# Altium PCB PCB1.PcbDoc
Units mil, origin at the board's own origin, x right, y up, seen from the top; angles counter-clockwise.
Board outline 2325 x 1332 mil, 2 copper layers (Top Layer, Bottom Layer), stack 61.756 mil thick; 66 components, 50 nets, 247 pads, 70 vias.
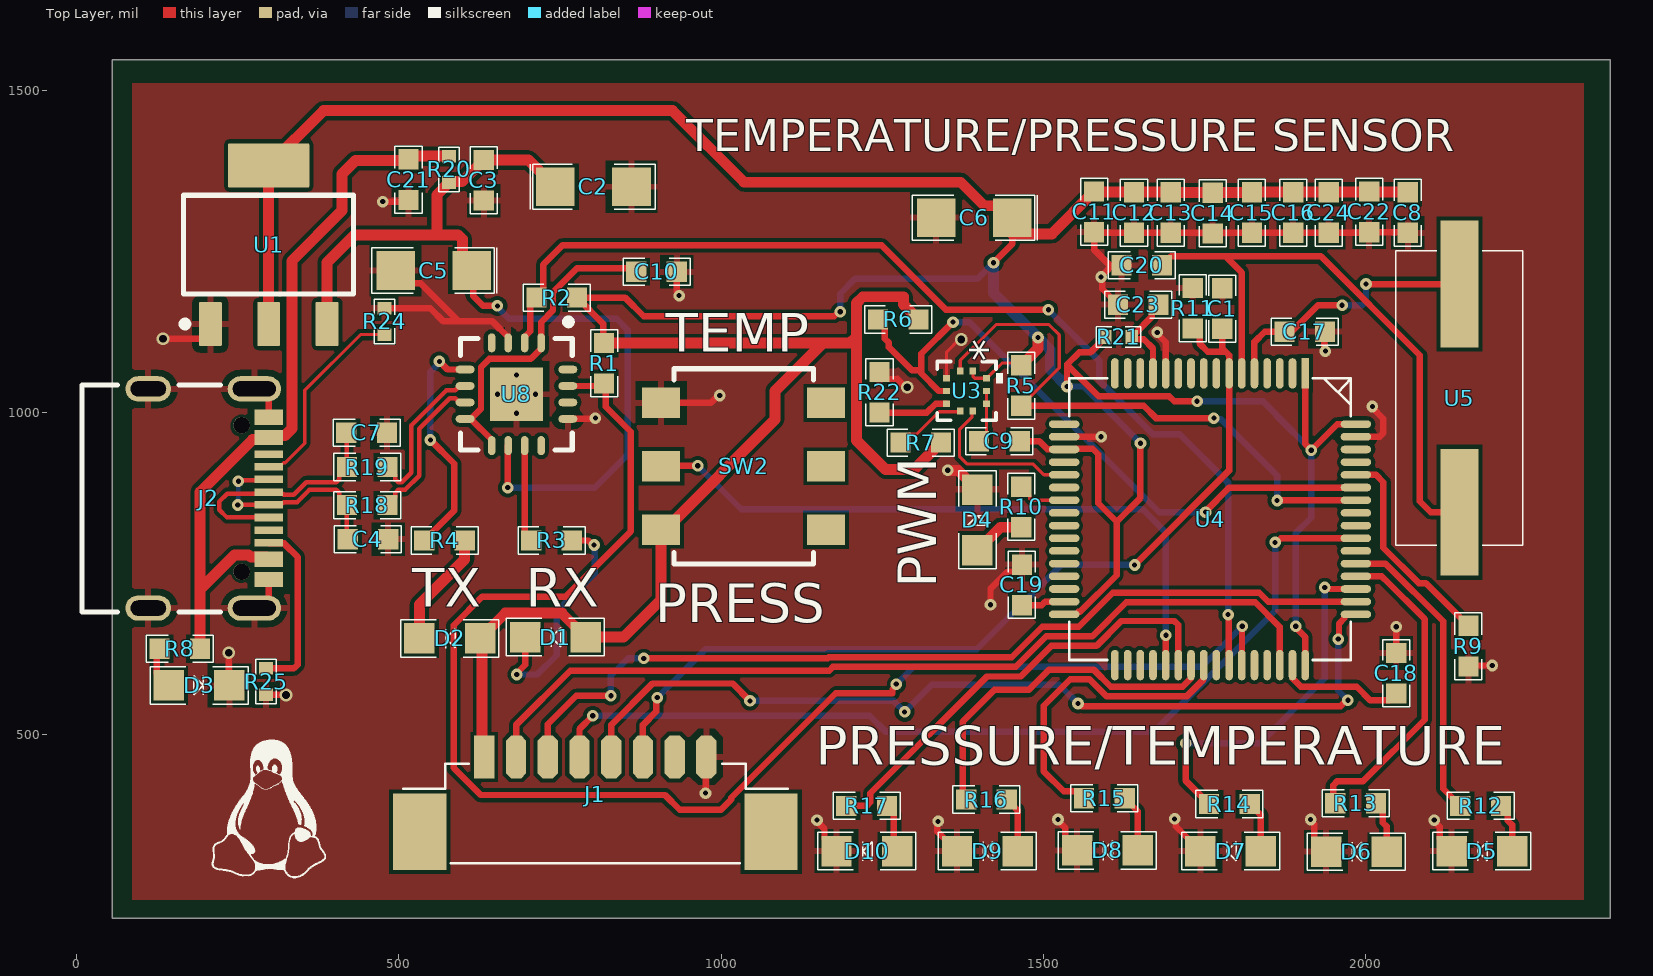
[diagram p0: Top Layer view]
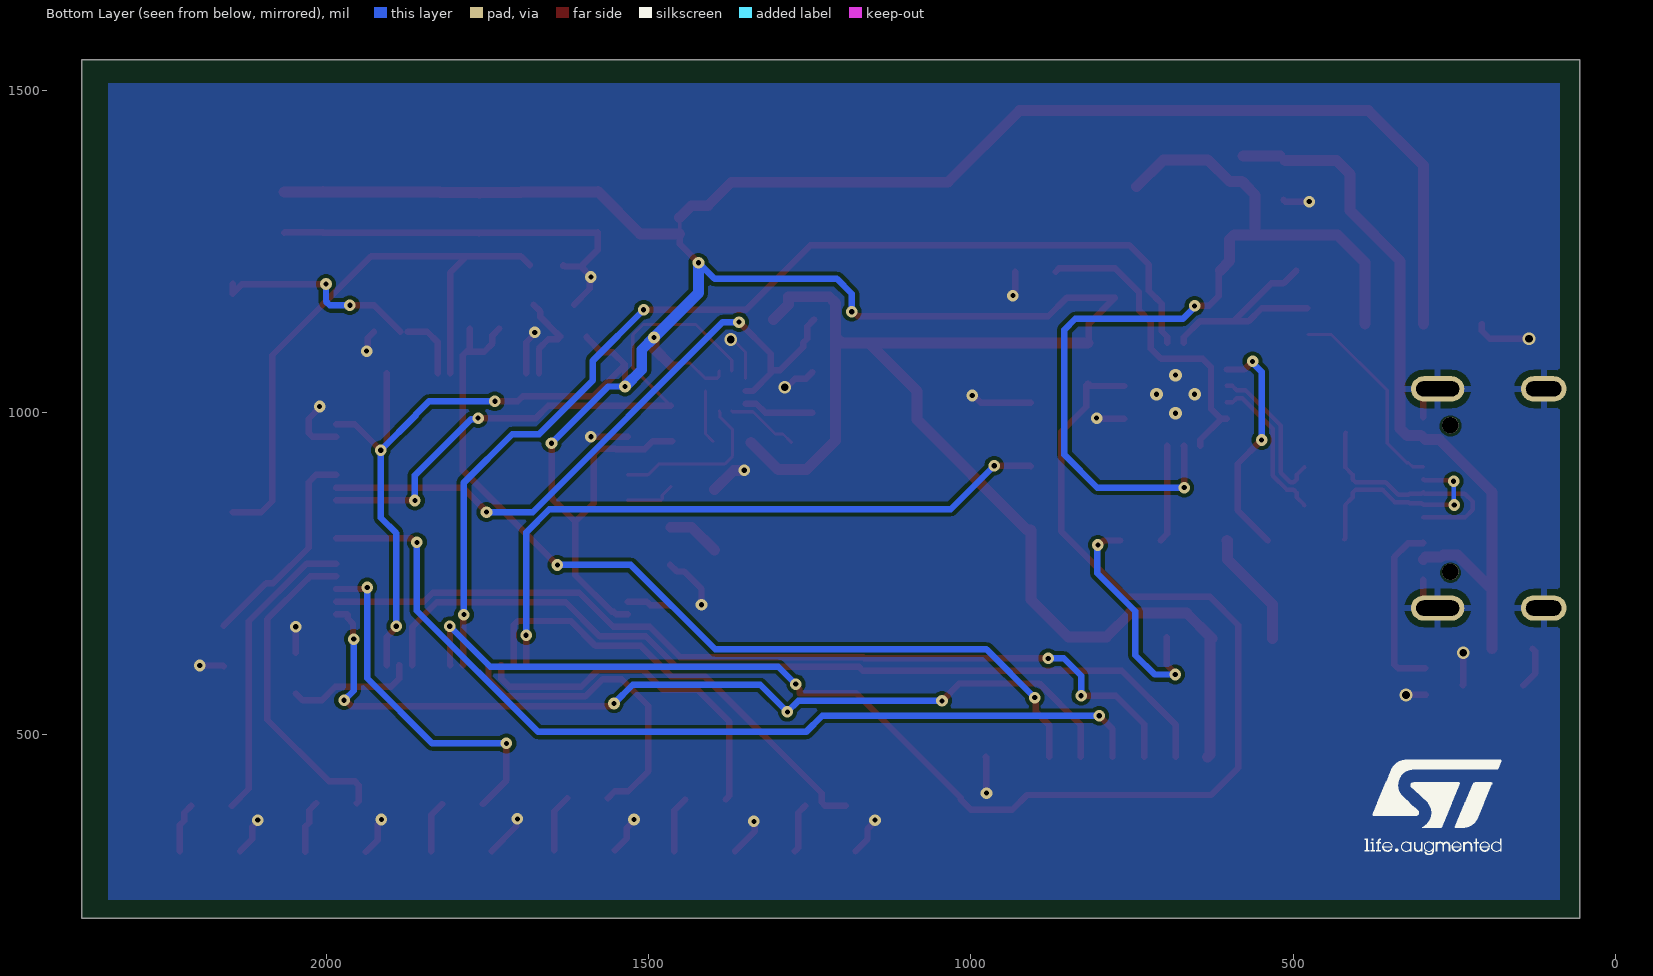
[diagram p1: Bottom Layer view, seen from below]

## Layer stack, top to bottom
Top Solder: solder mask 1, SM-001, Dk 4
Top Layer: signal copper 1.378
Dielectric 1: core 59, Core-043, Dk 4.3
Bottom Layer: signal copper 1.378
Bottom Solder: solder mask 1, SM-001, Dk 4

## Board outline
55,215 55,1547 2380,1547 2380,215

## Design rules (kind name [scope] priority, off if disabled: settings)
Clearance [All vs InPoly] p1: gap=6 ignorepadtopadclearanceinfootprint=FALSE except(0: Arc-Hole Track-Hole SMDPad-Hole THPad-Hole Via-Hole Fill-Hole Poly-Hole Region-Hole Text-Hole)
Clearance Clearance_1 [All] p2: gap=5 ignorepadtopadclearanceinfootprint=FALSE except(0: Arc-Hole Track-Hole SMDPad-Hole THPad-Hole Via-Hole Fill-Hole Poly-Hole Region-Hole Text-Hole)
DiffPairsRouting [All] p1: maxlimit=10 minlimit=5 mostfreqgap=5 toplayer_minwidth=4 toplayer_maxwidth=15 toplayer_prefwidth=5 bottomlayer_minwidth=4 bottomlayer_maxwidth=15 bottomlayer_prefwidth=5 maxuncoupledlength=500
MinimumSolderMaskSliver SilkscreenOverComponentPads [All] p2: minsoldermaskwidth=10
PolygonConnect PolygonConnect_1 [isvia] p1: connectstyle=Direct reliefconductorwidth=10 reliefentries=4 polygonreliefangle="90 Angle" airgapwidth=10
PolygonConnect [All] p2: connectstyle=Relief reliefconductorwidth=10 reliefentries=4 polygonreliefangle="90 Angle" airgapwidth=10
RoutingVias [All] p1: holewidth=8 width=18 viastyle="Through Hole" minholewidth=8 minwidth=18 maxholewidth=200 maxwidth=500
SolderMaskExpansion [All] p1: expansion=4 istentingtop=FALSE
SupplyNets "Schematic Supply Nets_4" [InNet('GND')] p1: voltage=0.000
SupplyNets "Schematic Supply Nets_3" [InNet('VCCIO')] p2: voltage=0.000
SupplyNets "Schematic Supply Nets_2" [InNet('3V3')] p3: voltage=0.000
SupplyNets "Schematic Supply Nets_1" [InNet('5V')] p4: voltage=0.000
SupplyNets "Schematic Supply Nets" [InNet('3V3A')] p5: voltage=0.000
Width [All] p1: maxlimit=100 minlimit=4 preferedwidth=5 minimp=50.000000 maximp=50.000000 favimp=50.000000
29 further rules are at their usual default settings.

## Classes and differential pairs
differential pair class 90ohm: USB
component class part_2: C1 C11 C12 C13 C14 C15 C16 C17 C18 C19 C20 C24 D4 D5 D6 D7 D8 D9 D10 J1 R9 R10 R11 R12 R13 R14 R15 R16 R17 SW2 U4 U5
component class part_1: C2 C3 C4 C5 C6 C7 C8 C9 C10 C21 C22 C23 D1 D2 D3 J2 R1 R2 R3 R4 R5 R6 R7 R8 R18 R19 R20 R21 R22 R24 R25 U1 U3 U8
differential pair AA: +AA_P -AA_N
differential pair USB: +USB_P -USB_N

## Components (designator, comment, footprint, x,y, rotation, side; value= is the part's Value field where it differs from the comment)
C1 "100n" 0603 1778,1161 r270 top
C2 "4.7u" TANT_A 802,1350 r0 top
C3 "100n" 0603 632,1360 r90 top
C4 "47p" 0603 452,803 r180 top
C5 "10u" TANT_A 554,1220 r180 top
C6 "100u" TANT_A 1393,1302 r180 top
C7 "47p" 0603 450,968 r180 top
C8 "100n" 0603 2066,1310 r90 top
C9 "100n" 0603 1432,955 r0 top
C10 "100n" 0603 900,1218 r180 top
C11 "100n" 0603 1579,1311 r90 top
C12 "100n" 0603 1641,1310 r90 top
C13 "100n" 0603 1698,1310 r90 top
C14 "100n" 0603 1763,1309 r90 top
C15 "100n" 0603 1824,1310 r90 top
C16 "4.7u" 0603 1888,1310 r90 top
C17 "30p" 0603 1906,1125 r0 top
C18 "2.2u" 0603 2048,595 r270 top
C19 "2.2u" 0603 1467,732 r270 top
C20 "30p" 0603 1653,1228 r180 top
C21 "10n" 0603 515,1361 r90 top
C22 "22u" 0603 2006,1311 r90 top
C23 "22u" 0603 1647.5,1167 r0 top
C24 "100n" 0603 1943,1310 r90 top
D1 "LED" Dioda_0805 743,651 r0 top
D2 "LED" Dioda_0805 579,649 r0 top
D3 "LED" Dioda_0805 190,576 r180 top
D4 "LED" Dioda_0805 1398,833 r270 top
D5 "LED" Dioda_0805 2181,319 r0 top
D6 "LED" Dioda_0805 1986,318 r0 top
D7 "LED" Dioda_0805 1791,319 r0 top
D8 "LED" Dioda_0805 1599.7,320 r0 top
D9 "LED" Dioda_0805 1413.25,318.85 r0 top
D10 "LED" Dioda_0805 1226.25,318.85 r0 top
J1 "53398-0871" 53398-0871 805,407 r0 top
J2 "629722000214" 629722000214 156.2,866.22 r270 top
R1 "10k" 0603 818.48,1076 r90 top
R2 "10k" 0603 745,1178 r0 top
R3 "330" 0603 737,801 r0 top
R4 "330" 0603 571,801 r0 top
R5 "4.7k" 0603 1466,1041.5 r90 top
R6 "4.7k" 0603 1275,1144 r0 top
R7 "4.7k" 0603 1310,953 r0 top
R8 "330" 0603 160,633 r180 top
R9 "10k" 0603 2160,637 r90 top
R10 "330" 0603 1466,853 r270 top
R11 "100k" 0603 1732,1161.5 r270 top
R12 "330" 0603 2179,389 r180 top
R13 "330" 0603 1985,393 r180 top
R14 "330" 0603 1789,392 r180 top
R15 "330" 0603 1595,401 r180 top
R16 "330" 0603 1412,399 r180 top
R17 "330" 0603 1226,389 r180 top
R18 "27" 0603 451,856 r180 top
R19 "27" 0603 451,915 r180 top
R20 "LCBA-601FERROCORE" 0402 578,1377 r270 top
R21 "LCBA-601FERROCORE" 0402 1617,1117 r0 top
R22 "4.7k" 0603 1246,1031 r270 top
R24 "5.1k" 0402 478,1141 r90 top
R25 "5.1k" 0402 294,582 r270 top
SW2 "452403012014" 452403012014 1035,916 r90 top
U1 "LM1117IMP-3.3/NOPB" DCY0004A_N 298,1260 r90 top
U3 "BMP390" 10LGA_2X2X0p75_BOS 1381,1033 r270 top
U4 "STM32F405RGT6" "LQFP 64 0.5" 1759,834 r180 top
U5 "SMDHC49 8Mhz" SMDHC_49 2146,1022 r90 top
U8 "FT230XQ-T" QFN-16_N 682.48,1028 r270 top

## Footprints (in the part's own frame and the unit in brackets; to place one, negate y for a bottom-side part, rotate by r counter-clockwise, add the part's x,y. Pads: shape width x height; smd on the part's side, far side on the other; paste and mask are expansions set on the pad)
10LGA_2X2X0p75_BOS [mil]
  rect 11x10 smd paste+0 mask+0: 1(-31,9.84) 2(-31,-9.84) 6(31,-9.84) 7(31,9.84)
  rect 10x11 smd paste+0 mask+0: 3(-19.68,-31) 4(0,-31) 5(19.68,-31) 8(19.68,31) 9(0,31) 10(-19.68,31)
  silkscreen extent -46,-46 46,56, body extent -41,-41 41,41, height 32
0402 [mm]
  rect 0.5x0.55 smd: 1(-0.521,0) 2(0.521,0)
  silkscreen extent -0.88,-0.41 0.88,0.41, body extent -0.67,-0.28 0.63,0.28, height 0.5
0603 [mm]
  rect 0.8x0.8 smd: 1(-0.8,0) 2(0.8,0)
  silkscreen extent -1.32,-0.53 1.32,0.53, body extent -1.09,-0.4 1.14,0.4, height 0.6
53398-0871 [mm] "Molex PicoBlade 8pin pionowy SMD"
  rect 2.1x3 smd: 0(-6.925,-1.475) 0(6.925,-1.475)
  rect 0.8x1.7 smd: 1(-4.375,1.475)
  oct 0.8x1.7 smd: 2(-3.125,1.475) 3(-1.875,1.475) 4(-0.625,1.475) 5(0.625,1.475) 6(1.875,1.475) 7(3.125,1.475) 8(4.375,1.475)
  silkscreen extent -7.57,-2.72 7.58,1.2, body extent -7.57,-2.57 7.57,1.62, height 4.7
452403012014 [mm] "SMT Mini Slide Switch, Same Side Connection"
  rect 1.2x1.5 smd: 1(-2.5,3.25) 2(0,3.25) 3(2.5,3.25) 4(-2.5,-3.25) 5(0,-3.25) 6(2.5,-3.25)
  silkscreen extent -3.85,-2.75 3.85,2.75, body extent -3.85,-3.75 3.85,3.75, height 3.48
629722000214 [mm] "USB TYPE C VERTICAL PLUG"
  rect 0.6x1.14 smd: A1/B12(-3.2,3.605) A4/B9(-2.4,3.605) A9/B4(2.4,3.605) A12/B1(3.2,3.605)
  rect 0.3x1.14 smd: A5(-1.25,3.605) A6(-0.25,3.605) A7(0.25,3.605) A8(1.25,3.605) B5(1.75,3.605) B6(0.75,3.605) B7(-0.75,3.605) B8(-1.75,3.605)
  round 0.65 hole 0.65 unplated: MH1(-2.89,2.535) MH2(2.89,2.535)
  oval 1x2.1 hole 0.6 slot 1.7 at 90 deg: Shell(-4.32,3.035) Shell(4.32,3.035)
  oval 1x1.8 hole 0.6 slot 1.4 at 90 deg: Shell(-4.32,-1.145) Shell(4.32,-1.145)
  silkscreen extent -4.47,-3.76 4.47,1.7, body extent -4.79,-3.76 4.79,3.95, height 3.33
DCY0004A_N [mm] "SOT223, 4-Leads, Body 6.7x3.7mm, Pitch 2.3mm, IPC Medium Density"
  rrect11% 1.75x0.9 smd: 1(-3.125,2.3) 2(-3.125,0) 3(-3.125,-2.3)
  rrect6% 1.75x3.2 smd: 4(3.125,0)
  silkscreen extent -3.25,-3.35 1.95,3.42, body extent -3.5,-3.25 3.5,3.25, height 1.62
Dioda_0805 [mm]
  rect 1.2x1.2 smd: 1(-1.194,0) 2(1.194,0)
  silkscreen extent -1.93,-0.74 1.93,0.74, body extent -1.44,-0.6 1.53,0.6, height 0.6
"LQFP 64 0.5" [mm] "Low-profile Quad Flat Package, 64 leads, 0.5 mm"
  rect 0.3x1.2 smd: 1(-3.75,-5.75)
  oval 0.3x1.2 smd: 2(-3.25,-5.75) 3(-2.75,-5.75) 4(-2.25,-5.75) 5(-1.75,-5.75) 6(-1.25,-5.75) 7(-0.75,-5.75) 8(-0.25,-5.75) 9(0.25,-5.75) 10(0.75,-5.75) 11(1.25,-5.75) 12(1.75,-5.75) 13(2.25,-5.75) 14(2.75,-5.75) 15(3.25,-5.75) 16(3.75,-5.75) 33(3.75,5.75) 34(3.25,5.75) 35(2.75,5.75) 36(2.25,5.75) 37(1.75,5.75) 38(1.25,5.75) 39(0.75,5.75) 40(0.25,5.75) 41(-0.25,5.75) 42(-0.75,5.75) 43(-1.25,5.75) 44(-1.75,5.75) 45(-2.25,5.75) 46(-2.75,5.75) 47(-3.25,5.75) 48(-3.75,5.75)
  oval 1.2x0.3 smd: 17(5.75,-3.75) 18(5.75,-3.25) 19(5.75,-2.75) 20(5.75,-2.25) 21(5.75,-1.75) 22(5.75,-1.25) 23(5.75,-0.75) 24(5.75,-0.25) 25(5.75,0.25) 26(5.75,0.75) 27(5.75,1.25) 28(5.75,1.75) 29(5.75,2.25) 30(5.75,2.75) 31(5.75,3.25) 32(5.75,3.75) 49(-5.75,3.75) 50(-5.75,3.25) 51(-5.75,2.75) 52(-5.75,2.25) 53(-5.75,1.75) 54(-5.75,1.25) 55(-5.75,0.75) 56(-5.75,0.25) 57(-5.75,-0.25) 58(-5.75,-0.75) 59(-5.75,-1.25) 60(-5.75,-1.75) 61(-5.75,-2.25) 62(-5.75,-2.75) 63(-5.75,-3.25) 64(-5.75,-3.75)
  silkscreen extent -5.55,-5.55 5.55,5.55, body extent -6,-6 6,6, height 1.5
QFN-16_N [mm] "QFN, 16-Leads, Body 4x4mm, Pitch 0.65mm, Thermal Pad 2.1x2.1mm, IPC Medium Density"
  oval 0.75x0.3 smd: 1(-2.025,0.975) 2(-2.025,0.325) 3(-2.025,-0.325) 4(-2.025,-0.975) 9(2.025,-0.975) 10(2.025,-0.325) 11(2.025,0.325) 12(2.025,0.975)
  oval 0.3x0.75 smd: 5(-0.975,-2.025) 6(-0.325,-2.025) 7(0.325,-2.025) 8(0.975,-2.025) 13(0.975,2.025) 14(0.325,2.025) 15(-0.325,2.025) 16(-0.975,2.025)
  rect 2.1x2.1 smd paste-1.05: 17(0,0)
  silkscreen extent -2.97,-2.2 2.2,2.2, body extent -2.05,-2.05 2.05,2.05, height 0.8
SMDHC_49 [mm]
  rect 5x1.5 smd: 1(-4.5,0) 2(4.5,0)
  silkscreen extent -5.8,-2.5 5.8,2.5, body extent -5.8,-2.5 5.8,2.5, height 4.3
TANT_A [mil]
  rect 60x60 smd: 1(-59.06,0) 2(59.06,0)
  silkscreen extent -98,-35 96,35, body extent -67,-33 67,33, height 67

## Part data
C1 C11 C12 C13 C14 C15 C16 C17 C18 C19 C20 C22 C23 C24: library part CapN, "kondensator ceramiczny"
  C1 C11 C12 C13 C14 C15 C16 C17 C18 C19 C20 C24: V="10 V"
  C22 C23: V=10V
C2 C5 C6: library part CapP, "kondensator tantalowy", VOLTAGE="10 V"
C3 C4 C7 C8 C9 C10 C21: library part CapN, "kondensator ceramiczny", VOLTAGE="10 V"
  C3 C4 C7 C8 C9 C10: V="10 V"
  C21: Parameter 1=10V
D1 D2 D3 D4 D5 D6 D7 D8 D9 D10: library part Dioda_LED, "Dioda LED SMD"
J1: library part CON8, "Molex PicoBlade 8pin", Producent=Molex
J2: "WR-COM USB 2.0 Type C Receptacle Horizontal SMT", Manufacturer="Wurth Elektronik", Operating Temperature Max=85°C, Operating Temperature Min=-40°C, Rated Current=5A, Working Voltage="20V (DC)", Application="USB 2.0", Category="Input/Output Connectors", ComponentLink1Description="Website Link", ComponentLink1URL=https://www.we-online.com/redexpert/article/629722000214?ad, ComponentLink2Description="Datasheet Link", ComponentLink2URL=https://www.we-online.com/redexpert/spec/629722000214?ad, Gender=Receptacle, Interface Type="Type C", Manufacturer Part Number=629722000214, Match Code=WR-USB, Mount="Surface Mount", Number of Pins=16, Number of Ports=1, Orientation=Horizontal, Packaging="Tape and Reel"
R1 R2 R3 R4 R5 R6 R7 R8 R9 R10 R11 R12 R13 R14 R15 R16 R17 R18 R19 R20 R21 R22 R24 R25: library part Res, "Rezystor SMD"
SW2: "WS-SLSV SMT Mini Slide Switch, Same Side Connection, DPDT, 6VDC, 300mA, 350g", Manufacturer="Wurth Elektronik", Operating Temperature Max=85°C, Operating Temperature Min=-40°C, Rated Current=300mA, Rated Voltage=6VDC, Category="Slide Switches", Circuit=DPDT, ComponentLink1Description="Website Link", ComponentLink1URL=https://www.we-online.com/redexpert/article/452403012014?ad, ComponentLink2Description="Datasheet Link", ComponentLink2URL=https://www.we-online.com/redexpert/spec/452403012014?ad, Contact Material="Copper Alloy", Contact Plating=Silver, Height=3.3mm, Length=7.7mm, Manufacturer Part Number=452403012014, Match Code=WS-SLSV, Mount="Surface Mount", Operation Force=350g, Packaging="Tape and Reel", Terminal Material="Copper Alloy", Terminal Plating=Silver, Width=5.5mm
U1: library part CMP-0062-01631-4, "800mA Low-Dropout Linear Regulator, 4-pin SOT-223, Pb-Free", Manufacturer="Texas Instruments", PackageTopMarking=XYTT*N05B, PowerWise=N, Code_IPC=SOT223-4, Code_JEDEC=TO-261-AA, ComponentLink1Description="Datasheet URL", ComponentLink1URL=http://www.ti.com/general/docs/lit/getliterature.tsp?genericPartNumber=LM1117-N&fileType=pdf, CompType="LDO IC", High-Reliability=Y, PackageDescription="Molded SOT-223, 6.50 x 3.56 x 1.6mm Body, 4 Lead, 2.3mm Pitch", PackageReference=DCY0004A, PartNumber=LM1117IMP-3.3/NOPB, PinCount=4, RoHS=Y
U3: "No Description Available", Mfr_Name="Bosch Sensortec", RefDes=RefDes, Type=Type
U4: library part STM32F415RGT6, "STM32F415, 64 leads, LQFP"
U5: library part kwarc, "rezonator kwarcowy"
U8: "USB to Basic UART Interface Chip, UHCI/OHCI/EHCI Compatible, USB 2.0 Compatible, -40 to +85 degC, 16-Pin QFN, Pb-Free, Tray", Manufacturer=FTDI, Code_JEDEC=MO-220WGGC, ComponentLink1Description="Manufacturer URL", ComponentLink1URL=http://www.ftdichip.com/, ComponentLink2Description=Datasheet, ComponentLink2URL=http://www.ftdichip.com/Support/Documents/DataSheets/ICs/DS_FT230X.pdf, ComponentLink3Description="FT230X Product Page", ComponentLink3URL=www.ftdichip.com/Products/ICs/FT230X.html, DatasheetVersion="ver 1.2, Feb-2013", PackageDescription="16-Pin Quad Flat No-Lead, 4x4 mm Body, 0.65 mm Pitch", PackageReference=QFN-16, PackageVersion=Feb-13, PartNumber=FT230XQ-T

## Via types
v1: diameter 18, hole 8, Top Layer to Bottom Layer, 61 vias
v2: diameter 19.68, hole 11.81, Top Layer to Bottom Layer, 5 vias
v3: diameter 19.68, hole 7.87, Top Layer to Bottom Layer, 4 vias

## Nets (pads, with @x,y where several pads share a name; then routed paths per layer and width w, separated by ;. In a path a pad name is that pad's centre, name@x,y a point inside that pad or via, vN(x,y) a via of type N, cw(c..) or ccw(c..) an arc to the next point about the centre after c; other vN are vias at no path point)
3V3: C6.1 C8.2 C9.2 C11.2 C12.2 C13.2 C14.2 C15.2 C16.2 C22.2 C24.2 D1.2 D2.2 J1.1 R1.2 R2.2 R5.2 R6.2 R7.2 R21.1 SW2.1 U1.2 U1.4 U3.1 U3.10 U4.1 U4.19 U4.32 U4.48 U4.64 | length 7172.6
  Top Layer w5: U3.1 1391,1063.84 1391,1055.84 1393.93,1052.91 1412.27,1052.91 1412.5,1052.68 1436.07,1076.26 1462.74,1076.26 R5.2 ; C6.1@1452.06,1277 C6.1
  Top Layer w10: R1.2 817,1108.97 817,1137.5 R2.2 851,1178 880,1149 1175.84,1149 1182.84,1156 v1(1185,1156) ; v1(1422.94,1232) 1452.06,1261.11 C6.1@1452.06,1277 ; C9.2 1494.24,955 1506.63,942.61 1532.28,942.61 U4.19 1550.83,942.27 1551.73,943.17 1577.15,943.17 1585.46,934.86 1585.46,858.56 1614,830.03 ; U4.32 1550.83,686.36 1554.61,690.14 1556.93,690.14 1614,747.21 1614,830.03 ; v1(1537,1040) 1537,1063.32 1537.5,1063.82 1537.5,1074.5 1555.84,1092.84 1573.32,1092.84 1596.5,1116.02 R21.1 ; 1537.5,1073.5 1586,1025 1695.43,1025 1703.43,1017 v1(1739,1017) ; v1(1651,952) 1651,867.03 1614,830.03 ; v1(1892,668) 1892,665.84 1906.64,651.2 U4.48 ; U4.1 1906.64,950.86 1916,941.5 v1(1916,941) 1956.29,981.29 1985.03,981.29 U4.64
  Top Layer w17: U1.2 U1.4 382.97,1468 925,1468 1036,1357 1372,1357 1408.5,1320.5 1433.55,1320.5 C6.1 ; J1.1 629.38,468.45 629.38,645.62 D2.2 665.12,688.12 752.88,688.12 D1.2 849,651 907.05,709.05 SW2.1 912.95,817.57 1084,988.62 1084,1033 1158.3,1107.3 ; R1.2 818.67,1107.3 1158.3,1107.3 ; 1210,1117.82 1210,956 1255,911 1299.5,911 R7.2 ; R6.2 1283.25,1167.25 1283.25,1179.25 1219.96,1179.25 1210,1169.29 1210,1117.26 1200.04,1107.3 1158.3,1107.3 ; C6.1@1452.06,1277 1513.5,1277 C11.2 ; R5.2 1491.81,1098.8 1491.81,1115.81 v1(1492,1116) ; C11.2@1579,1341.5 C12.2 C13.2 1698.5,1341 1762.5,1341 C14.2 1763.5,1341 1823.5,1341 C15.2 C16.2 C24.2 1943.5,1342 2005.5,1342 C22.2 2006.5,1342 2065.5,1342 C8.2
  Bottom Layer w10: v1(1185,1156) 1185,1184 1208,1207 1397.94,1207 1402.47,1211.53 v1(1422.94,1232) ; v1(1537,1040) 1563,1040 v1(1651,952) ; v1(1739,1017) 1841.14,1017 1862,996.14 1862,995 v1(1916,941) 1916,836.48 1892,812.48 v1(1892,668)
  Bottom Layer w17: v1(1422.94,1232) 1422.94,1185.06 v1(1492,1116) 1511,1097 1511,1066 v1@1536.81,1040.19
3V3A: C23.2 R21.2 U4.13 | length 146.8
  Top Layer w10: U4.13 1670.42,1099 1655.9,1113.52 1640.98,1113.52 R21.2 1637.5,1117.98 1642.34,1122.83 1643.33,1122.83 1668.24,1147.74 1668.24,1156.26 C23.2
5V: C2.1 C3.2 C5.1 R20.2 U1.3 U8.10 | length 1436.5
  Top Layer w10: C5.1 615.14,1217.91 615.14,1180.86 631,1165 v1(653,1165) ; v1(669,883) 669.34,883.34 669.34,947.93 U8.10
  Top Layer w17: U1.3 388.55,1232.55 431.06,1275.06 559,1275.06 ; C5.1 598.51,1234.54 598.51,1268.49 591.94,1275.06 559,1275.06 ; C2.1 701.45,1391.5 C3.2 598.35,1357.84 579.34,1357.84 R20.2 577.02,1356.5 575.67,1355.16 575.67,1354.17 559,1337.5 559,1275.06
  Bottom Layer w10: v1(653,1165) 653,1163 671,1145 838,1145 855,1128 855,934 804,883 v1(669,883)
AA_N: R18.1 U8.7 | length 238.9
  Top Layer w7: R18.1 494.74,868.25 494.74,875.4 498.84,879.5 509.61,879.5 531.5,901.39 531.5,974.6 578.9,1022 587.39,1022 594.18,1015.2 U8.7
AA_P: R19.1 U8.6 | length 238.9
  Top Layer w7: R19.1 494.74,902.75 494.74,895.6 498.84,891.5 504.64,891.5 519.5,906.36 519.5,979.57 573.93,1034 587.39,1034 594.18,1040.79 U8.6
GND: C1.1 C2.2 C3.1 C4.1 C5.2 C6.2 C7.1 C8.1 C10.1 C11.1 C12.1 C13.1 C14.1 C15.1 C16.1 C17.2 C18.1 C19.1 C20.2 C21.1 C22.1 C23.1 C24.1 D3.1 D4.1 D5.1 D6.1 D7.1 D8.1 D9.1 D10.1 J1.8 J2.A1/B12 J2.A12/B1 J2.Shell R9.1 R11.1 R22.1 R24.2 R25.2 SW2.3 U1.1 U3.3 U4.12 U4.18 U4.63 U8.3 U8.13 U8.17 | length 2543.2
  Top Layer w5: U3.3 1350,1093 1370,1113 v2(1373,1113)
  Top Layer w10: v2(134,1114) 194.73,1114 207.45,1126.72 U1.1 ; v2(236,627) 236,577 D3.1 ; J2.Shell@275.69,696.14 284.56,696.14 298.13,709.71 J2.A12/B1 ; J2.Shell@275.69,1036.3 284.56,1036.3 298.13,1022.73 J2.A1/B12 ; R25.2 294.25,561.25 324.75,561.25 v2@325,561 ; v1(475,1327) 512.5,1327 C21.1 ; R24.2 548.92,1161.5 569.42,1141 593,1141 ; C5.2 515.03,1199.91 534.09,1199.91 593,1141 ; U8.3 669.68,1116.58 645.26,1141 593,1141 ; U8.13 762.55,989.96 803.96,989.96 v1(805,991) ; SW2.3 984.26,1014.43 995.84,1026 v1(998,1026) ; C10.1 931.5,1186.67 935,1183.16 v1(935,1181) ; v1(976,409) 976.62,409.62 976.62,464.45 J1.8 ; v1(1149,367) 1149,364.84 1160.63,353.21 1160.63,337.47 D10.1 ; R22.1 1256.75,1051.75 1273.63,1051.75 1286.38,1039 v2(1289,1039) ; v1(1337,365) 1337,362.84 1335.3,361.14 1335.3,349.79 D9.1 ; v1(1418.22,701.3) 1418.22,726.22 1444.89,752.89 1456.4,752.89 C19.1 ; v1(1523,368) 1523,365.84 1534.07,354.76 1534.07,338.62 D8.1 ; U4.18 v1(1590,962) ; C23.1 1591.53,1191.47 1591.53,1208.47 v1(1590,1210) 1590,1211 1605.24,1226.24 ; C20.2@1632.5,1227.02 1632.5,1228 1630.74,1226.24 1605.24,1226.24 ; v1(1677,1124) 1677,1121.84 1690.1,1108.73 U4.12 ; v1(1704,369) 1705.53,367.47 1705.53,357.47 D7.1 ; v1(1915,368) 1915,365.84 1920.38,360.46 1920.38,336.62 D6.1 ; C17.2@1926.5,1125 1936.47,1115.03 1936.47,1096.53 v1(1938,1095) ; U4.63 2022.14,961.95 2028,967.81 2028,989.84 2011,1006.84 v1(2011,1009) ; C18.1 v1(2048,667) ; C8.1 2065,1279.5 C22.1 2005,1278.5 C24.1 C16.1 C15.1 1764,1278.5 C14.1 1762,1278.5 C13.1 C12.1 1580,1278.5 C11.1 1579,1252.48 1605.24,1226.24 ; v1(2107,367) 2107,364.84 2115.38,356.46 2115.38,337.62 D5.1 ; R9.1 2161.5,607 v1(2197,607)
  Top Layer w17: v1(1352,910) 1352.19,909.81 1368.19,909.81 D4.1
  other v2: 324.88,561.12
  other v3: 682.47,998.47 652.94,1028 712,1028 682.47,1057.53
INT: U3.7 U4.21 | length 253.3
  Top Layer w5: U3.7 1389.37,1000.53 1389.37,992.37 1370,973 1370,932 1382.48,919.52 1484.48,919.52 1501.1,902.9 U4.21
MEAS1: R12.2 U4.53 | length 470.2
  Top Layer w10: U4.53 2031.33,765.1 2121,675.43 2121,415.5 R12.2
MEAS2: R13.2 U4.52 | length 503.8
  Top Layer w10: R13.2 1950.12,396.39 1950.12,421.14 1955.97,427 1996,427 2092,523 2092,679.01 2029.37,741.64 2029,741.64 2025.22,745.42 U4.52
MEAS3: R14.2 U4.51 | length 557.3
  Top Layer w10: v1(1721,486) 1721,428.5 R14.2 ; v1(1937,728) 1939.16,728 1941.43,725.73 U4.51
  Bottom Layer w10: v1(1721,486) 1836,486 1937,587 v1(1937,728)
MEAS4: R15.2 U4.40 | length 491
  Top Layer w10: R15.2 1552.76,411.75 1531.73,411.75 1501.02,442.46 1501.02,544.57 1542.07,585.62 1571.94,585.62 1598.56,559 1722.59,559 1748.81,585.22 1748.81,607.28 U4.40
MEAS5: R16.2 U4.39 | length 548.1
  Top Layer w10: R16.2 1375,404.5 1375,520 1424,569 1477.75,569 1509.37,600.62 1578.15,600.62 1604.77,574 1716.38,574 1729.13,586.75 1729.13,607.28 U4.39
MEAS6: R17.2 U4.38 | length 707.2
  Top Layer w10: R17.2 1225.89,389 1231.75,394.86 1231.75,408.89 1412.74,589.88 1465.23,589.88 1512.63,637.29 1582.62,637.29 1621.38,676.05 1703.58,676.05 1709.44,670.19 1709.44,607.97 U4.38
MEASUREMENT_MODE: SW2.2 U4.37 | length 1032.7
  Top Layer w10: SW2.2 908.05,917 v1(964,917) ; U4.37 1690.27,607.79 1690.27,653.83 v1(1690.44,654)
  Bottom Layer w10: v1(964,917) 1031.43,849.57 1654.35,849.57 1690.44,813.48 v1(1690.44,654)
NetC9_1: C9.1 U3.8 U3.9 | length 82.8
  Top Layer w5: C9.1 1412,966.5 U3.8 U3.9
NetD1_1: D1.1 R3.2 | length 371.1
  Top Layer w10: v1(683,593) 683,595.16 696,608.16 D1.1 ; R3.2 793.84,801 800.84,794 v1(803,794)
  Bottom Layer w10: v1(683,593) 715,593 745,623 745,691 804,750 804,793 v1(803,794)
NetD2_1: D2.1 R4.2 | length 181.2
  Top Layer w17: D2.1 532,701.5 602.08,771.58 602.08,800.58 R4.2
NetD3_2: D3.2 R8.2 | length 66.4
  Top Layer w10: R8.2 124.38,628.87 124.38,594.62 D3.2
NetD4_2: D4.2 R10.2 | length 88.8
  Top Layer w5: R10.2@1461.68,817.18 R10.2
  Top Layer w17: D4.2 1433.5,821.5 R10.2
NetD5_2: D5.2 R12.1 | length 77.3
  Top Layer w10: R12.1 2221.24,378.25 2221.24,366.25 2228,359.5 D5.2
NetD6_2: D6.2 R13.1 | length 81.8
  Top Layer w10: R13.1 2027.24,382.25 2027.24,363.01 2033,357.25 D6.2
NetD7_2: D7.2 R14.1 | length 80.3
  Top Layer w10: R14.1 1838,374.5 D7.2
NetD8_2: D8.2 R15.1 | length 89.4
  Top Layer w10: R15.1 1646.7,380.8 D8.2
NetD9_2: D9.2 R16.1 | length 87.1
  Top Layer w10: R16.1 1460.25,382.25 D9.2
NetD10_2: D10.2 R17.1 | length 76.7
  Top Layer w10: R17.1 1268.24,378.25 1268.24,323.86 D10.2
NetJ2_A5: J2.A5 R24.1 | length 311.8
  Top Layer w5: J2.A5 314.66,915.43 320.94,921.71 323.67,921.71 354,952.04 354,1034 440.5,1120.5 R24.1@477.02,1120.5
NetJ2_B5: J2.B5 R25.1 | length 271.4
  Top Layer w10: R25.1@294.98,602.5 337.14,602.5 343,608.36 343,775.25 321.84,796.42 299.03,796.42 J2.B5
NetR7_1: R7.1 U3.6 | length 113
  Top Layer w5: R7.1 1291.75,966.25 1303.75,966.25 1338.32,1000.82 1369.97,1000.82 U3.6
NetR9_2: R9.2 U4.60 | length 331.3
  Top Layer w10: U4.60 2016.5,902.9 2028,891.4 2028,789.65 2083.2,734.44 2094.05,734.44 R9.2
NetR22_2: R22.2 U3.5 | length 109.7
  Top Layer w10: R22.2 1319.33,999.5 1333.14,1013.32 U3.5
OSC_IN: C17.1 U4.5 U5.2 | length 430.6
  Top Layer w10: U4.5 1827.9,1109.14 1843.76,1125 C17.1 ; C17.1@1885.5,1125 1926.5,1166 v1(1964,1166) ; v1(2001,1199) 2130.83,1199 2146,1183.83 U5.2
  Bottom Layer w10: v1(1964,1166) 1995.14,1166 2001,1171.86 v1(2001,1199)
OSC_OUT: C20.1 U4.6 U5.1 | length 956.9
  Top Layer w5: U4.6@1808.08,1060.51 U4.6
  Top Layer w10: C20.1 1698.5,1242 1783,1242 ; U4.6 1808.21,1216.79 1783,1242 ; U5.1 2101.47,844.83 2084.62,861.69 2084.62,1088.51 1931.13,1242 1783,1242
PWM: R10.1 U4.23 | length 78.5
  Top Layer w5: R10.1 1479.25,871.25 1479.25,865.74 1481.46,863.53 U4.23
RXD: R2.1 U4.42 U8.2 | length 1676.5
  Top Layer w10: U8.2 695.27,1117.07 704,1125.8 R2.1@704,1168.5 ; R2.1 R2.1@704,1168.5 ; v1(1508,1159) 1349.13,1159 1249.13,1259 754,1259 724.25,1229.25 724.25,1188.75 R2.1@704,1168.5 ; v1(1787,686) 1788.18,684.82 1788.18,607.97 U4.42
  Bottom Layer w10: v1(1508,1159) 1586.78,1080.22 1586.78,1049.55 1670.33,966 1712,966 1787,891 v1(1787,686)
RXLED: R3.1 U8.11 | length 151.5
  Top Layer w10: U8.11 695.27,811.23 R3.1
SCL: R5.1 U3.2 U4.58 | length 937.7
  Top Layer w5: U3.2 1371.16,1079.48 1371.16,1080.4 1426.75,1136 1509,1136 1525,1120 1525,1069 R5.1
  Top Layer w10: R5.1 1656,1010 1675,991 v1(1765,991) ; v1(1863,863) 1863.26,863.26 1985.11,863.26 U4.58
  Bottom Layer w10: v1(1765,991) 1766.53,989.47 1775.61,989.47 1863,902.08 v1(1863,863)
SDA: R6.1 U3.4 U4.59 | length 1029.9
  Top Layer w10: R6.1 1254.25,1133.25 1254.25,1114.25 1260.25,1108.25 1260.25,1101.19 1296.44,1065 1310.58,1065 ; U3.4 1338.11,1033 1310.58,1060.52 1310.58,1065 ; v1(1360,1140) 1310.58,1090.58 1310.58,1065 ; v1(1752,845) 1752,846.13 1788.98,883.11 1985.27,883.11 U4.59
  Bottom Layer w10: v1(1360,1140) 1385.13,1140 1680.13,845 v1(1752,845)
STM32_D_JCLK: J1.5 U4.49 | length 1433.7
  Top Layer w10: J1.5 829.61,514.79 893.82,579 1018,579 v1(1045,552) ; v1(1554,548) 1556.16,548 1560.16,544 1961.84,544 1970.84,553 v1(1973,553) ; v1(1958,648) 1959.14,649.14 1959.14,672 1967.32,680.18 1967.32,685.53 1968.15,686.36 U4.49
  Bottom Layer w10: v1(1045,552) 1268,552 v1(1285,535) 1327,577 1525,577 v1(1554,548) ; v1(1958,648) 1958,568 v1(1973,553)
STM32_D_JTDI: J1.3 U4.50 | length 1413.6
  Top Layer w10: J1.3 731.18,515.98 775.2,560 v1(829,560) ; v1(880,618) 1165.65,618 1167.53,619.88 1451.02,619.88 1498.42,667.29 1555.28,667.29 1608,720 1835.21,720 1849.17,706.05 U4.50
  Bottom Layer w10: v1(829,560) 829,591 856,618 v1(880,618)
STM32_D_JTDO: J1.4 U4.55 | length 1453.8
  Top Layer w10: J1.4 780.39,508.39 v1(801,529) ; v1(1860,798) 1862.16,798 1868.64,804.47 U4.55
  Bottom Layer w10: v1(801,529) 1230.85,529 1256.02,503.84 1671.71,503.84 1860,692.13 v1(1860,798)
STM32_D_JTMS: J1.2 U4.46 | length 1388.8
  Top Layer w10: J1.2 681.97,514.79 766.18,599 1167.86,599 1173.75,604.88 1457.23,604.88 1504.63,652.29 1576.41,652.29 1629.12,705 1829,705 1866.92,667.08 1866.92,607.97 U4.46
STM32_D_RST: C1.2 J1.6 R11.2 U4.7 | length 1432.8
  Top Layer w10: J1.6 878.82,514.79 899.53,535.5 899.53,555.53 v1(901.07,557.07) ; v1(1642,763) 1788.53,909.53 U4.7 1788.87,1060.72 1788.87,1079.72 1789.01,1079.86 1789.01,1088.14 1783.15,1094 ; R11.2 1742.75,1119.26 1742.75,1106.76 1755.5,1094 1783.15,1094 ; C1.2 1778,1099.15 1783.15,1094
  Bottom Layer w10: v1(901.07,557.07) 976,632 1397,632 1528,763 v1(1642,763)
TXD: R1.1 U4.43 U8.15 | length 2298
  Top Layer w10: U8.15 814.77,1040.79 R1.1 821,1041.98 821,1008.7 860,969.7 860,815 759,714 629.61,714 585,669.39 585,448 627,406 913,406 936,383 1000,383 1016.08,399.08 1016.08,401.91 1178.17,564 1266.14,564 1266.14,569.98 1272,575.84 v1(1272,578) ; U4.43 1808.56,607.97 1808.56,667.56 v1(1809,668)
  Bottom Layer w10: v1(1272,578) 1299,605 1746,605 v1(1809,668) v1@1808.5,668.5
TXLED: R4.1 U8.5 | length 363.4
  Top Layer w10: R4.1 586,847.5 586,920 v1(549,957) ; v1(563,1079) 575.62,1066.38 U8.5
  Bottom Layer w10: v1(549,957) 549,1062.84 563,1076.84 v1(563,1079)
USB_N: C4.2 J2.A7 J2.B7 R18.2 | length 332.3
  Top Layer w7: v1(250,856) 250.19,856.19 297.94,856.19 J2.A7 300.53,858.78 319.73,858.78 321.17,860.22 342.02,860.22 361.3,879.5 403.16,879.5 407.26,875.4 407.26,868.25 R18.2 419.5,804 C4.2 ; v1(251,893) 252.37,894.37 296.75,894.37 J2.B7
  Bottom Layer w7: v1(250,856) 250.5,856.5 250.5,892.5 v1(251,893)
USB_P: C7.2 J2.A6 J2.B6 R19.2 | length 375.6
  Top Layer w7: J2.B6 233.31,836.69 221.4,848.6 221.4,861.4 233.66,873.66 295.72,873.66 J2.A6 300.53,873.66 319.73,873.66 321.17,872.22 337.05,872.22 356.33,891.5 403.16,891.5 407.26,895.6 407.26,902.75 R19.2 419.5,967 C7.2
VBUS: C21.2 J2.A4/B9 J2.A9/B4 R8.1 R20.1 | length 1160.2
  Top Layer w10: C21.2 C21.2@520,1397.5
  Top Layer w17: R8.1 191.5,725.12 ; J2.A9/B4 294.82,775.04 270.58,775.04 266.89,778.74 245.11,778.74 191.5,725.12 ; C21.2@513,1390.5 432.5,1390.5 412,1370 412,1313 334.07,1235.07 334.07,974.8 323.28,964.02 301.44,964.02 J2.A4/B9 294.82,957.4 272.97,957.4 191.5,875.93 191.5,725.12 ; C21.2@520,1397.5 R20.1
VCAP1: C18.2 U4.47 | length 200.2
  Top Layer w10: U4.47 1887.3,607.28 1887.3,586.75 1900.05,574 1986.51,574 2007.76,552.76 2037.25,552.76 C18.2
VCAP2: C19.2 U4.31 | length 67.9
  Top Layer w10: C19.2 1497.75,700.5 1502.95,705.7 1532.28,705.7 U4.31
VCCIO: C10.2 U8.1 U8.8 U8.9 | length 498.1
  Top Layer w10: U8.8 U8.8@611.61,989.61 ; U8.9 644.09,957.13 U8.8@611.61,989.61 ; C10.2 862.7,1223.8 776.66,1223.8 739.25,1186.39 739.25,1158.11 720.86,1139.72 U8.1 720.86,1098.86 704.96,1082.96 640.62,1082.96 627.52,1069.86 627.52,1005.52 U8.8@611.61,989.61
pads on no net: J1.0 J1.7 J2.A8 J2.B8 J2.MH1 J2.MH2 SW2.4 SW2.5 SW2.6 U4.2 U4.3 U4.4 U4.8 U4.9 U4.10 U4.11 U4.14 U4.15 U4.16 U4.17 U4.20 U4.22 U4.24 U4.25 U4.26 U4.27 U4.28 U4.29 U4.30 U4.33 U4.34 U4.35 U4.36 U4.41 U4.44 U4.45 U4.54 U4.56 U4.57 U4.61 U4.62 U8.4 U8.12 U8.14 U8.16

## Polygon pours and split planes (outlines as drawn)
GND on Bottom Layer "GND_L02_P008" (solid, pour order 8): 93.15,1510.59 98.15,1510.59 2339,1510.59 2339,243.59 86.15,243.59 86.15,1502.59 86.15,1510.59
GND on Top Layer "GND_L01_P007" (solid, pour order 7): 93.15,1510.59 98.15,1510.59 2339,1510.59 2339,243.59 86.15,243.59 86.15,1502.59 86.15,1510.59

## Other copper
Top Layer:
  pour cut-out: 255.96,961.93 cw(c255.96,978.96) 238.93,978.96 cw(c255.96,978.96) 255.96,995.99 cw(c255.96,978.96) 272.99,978.96 cw(c255.96,978.96)
  pour cut-out: 255.64,735.51 cw(c255.64,751.05) 240.1,751.05 cw(c255.64,751.05) 255.64,766.59 cw(c255.64,751.05) 271.18,751.05 cw(c255.64,751.05)
Bottom Layer:
  pour cut-out: 255.8,735.68 cw(c255.8,751.22) 240.26,751.22 cw(c255.8,751.22) 255.8,766.76 cw(c255.8,751.22) 271.35,751.22 cw(c255.8,751.22)
  pour cut-out: 255.8,962.93 cw(c255.41,979.4) 238.94,979 cw(c255.18,978.39) 255.8,994.63 cw(c255.8,977.72) 272.72,977.72 cw(c256.87,978.78)

## Silkscreen, mask and mechanical layers (free items; w line width, h text height)
Top Overlay:
  region: 692 vertices and 6 holes, not listed, extent 209.62,276.8 386.78,491.93
  text "TEMPERATURE/PRESSURE SENSOR" at 946,1405 h50
  text "TEMP" at 914,1094 h60
  text "PWM" at 1334,728 h60 r90
  text "TX" at 521,698 h60
  text "RX" at 697,698 h60
  text "PRESS" at 898,674 h60
  text "PRESSURE/TEMPERATURE" at 1147,453 h60
Bottom Overlay:
  drawing of 18 lines, arcs and shapes, not listed
Mechanical 1:
  the board outline again, w10
Top Component Center:
  lines w1.97: 136.32,865 175.68,865 ; 156,845.32 156,884.68

## Text inside footprints (layer, text, board x,y; h text height)
U3: Top Overlay "*" at 1365.84,1113 h50 r270; Top 3D Body "*" at 1365.84,1040 h50 r270